# Altium PCB Distro_layout.PcbDoc
Units mm, origin at the board's own origin, x right, y up, seen from the top; angles counter-clockwise.
Board outline 31.75 x 58.42 mm, 2 copper layers (Top Layer, Bottom Layer); 9 components, 13 nets, 54 pads, 3 vias.
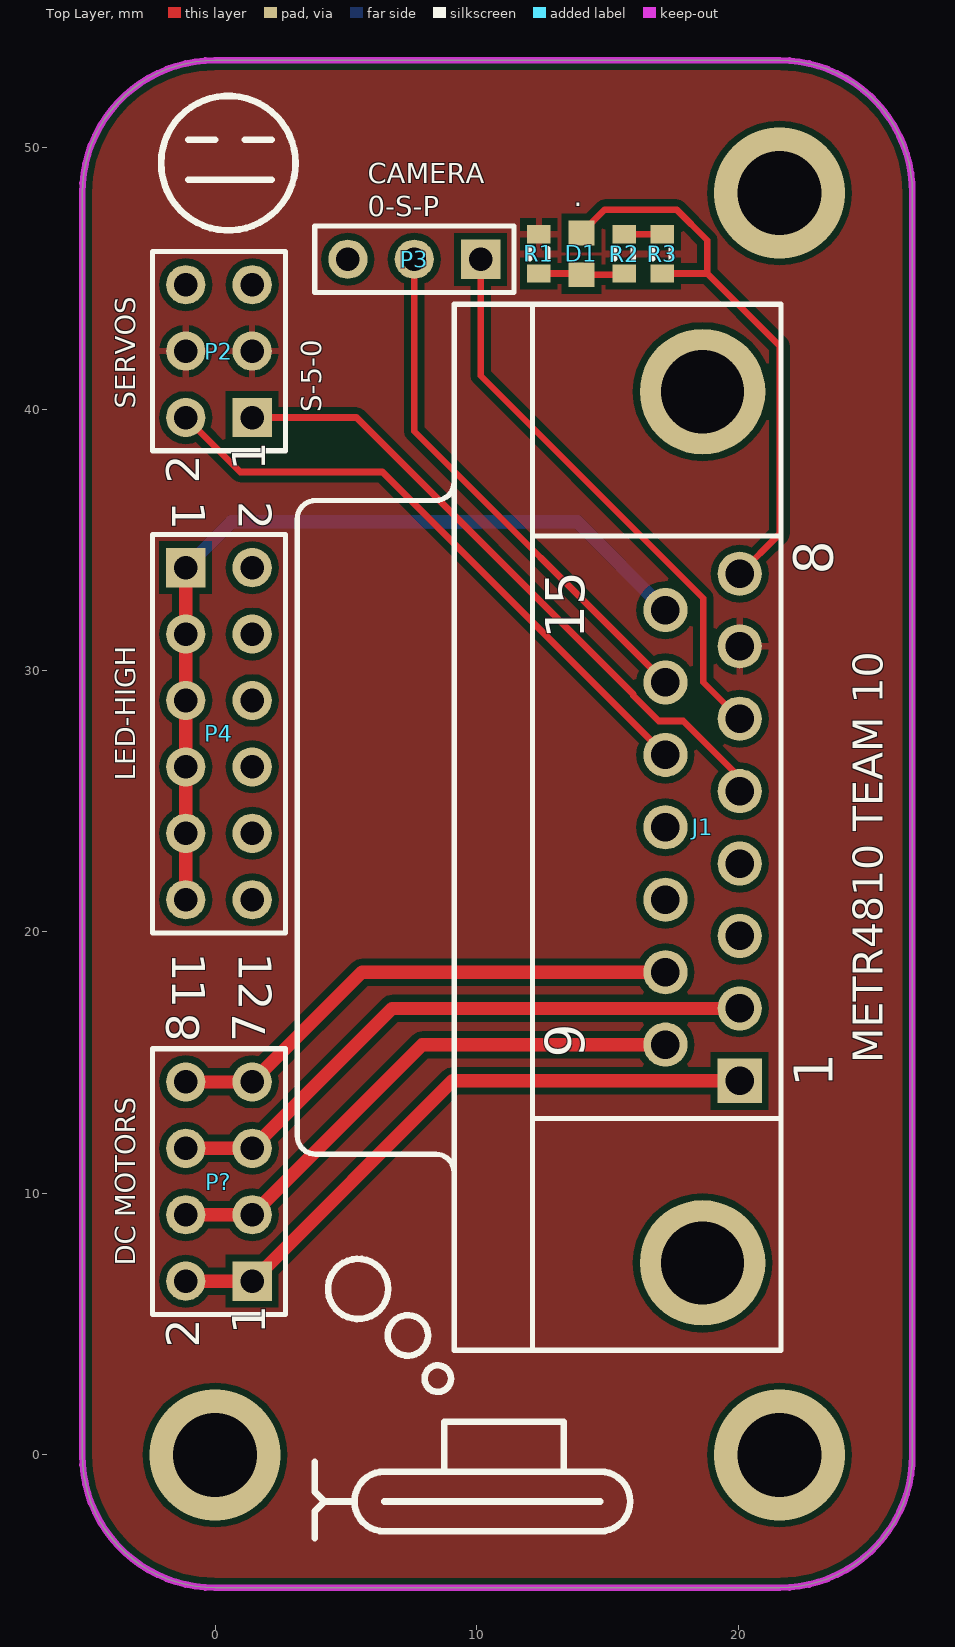
[diagram p0: Top Layer view]
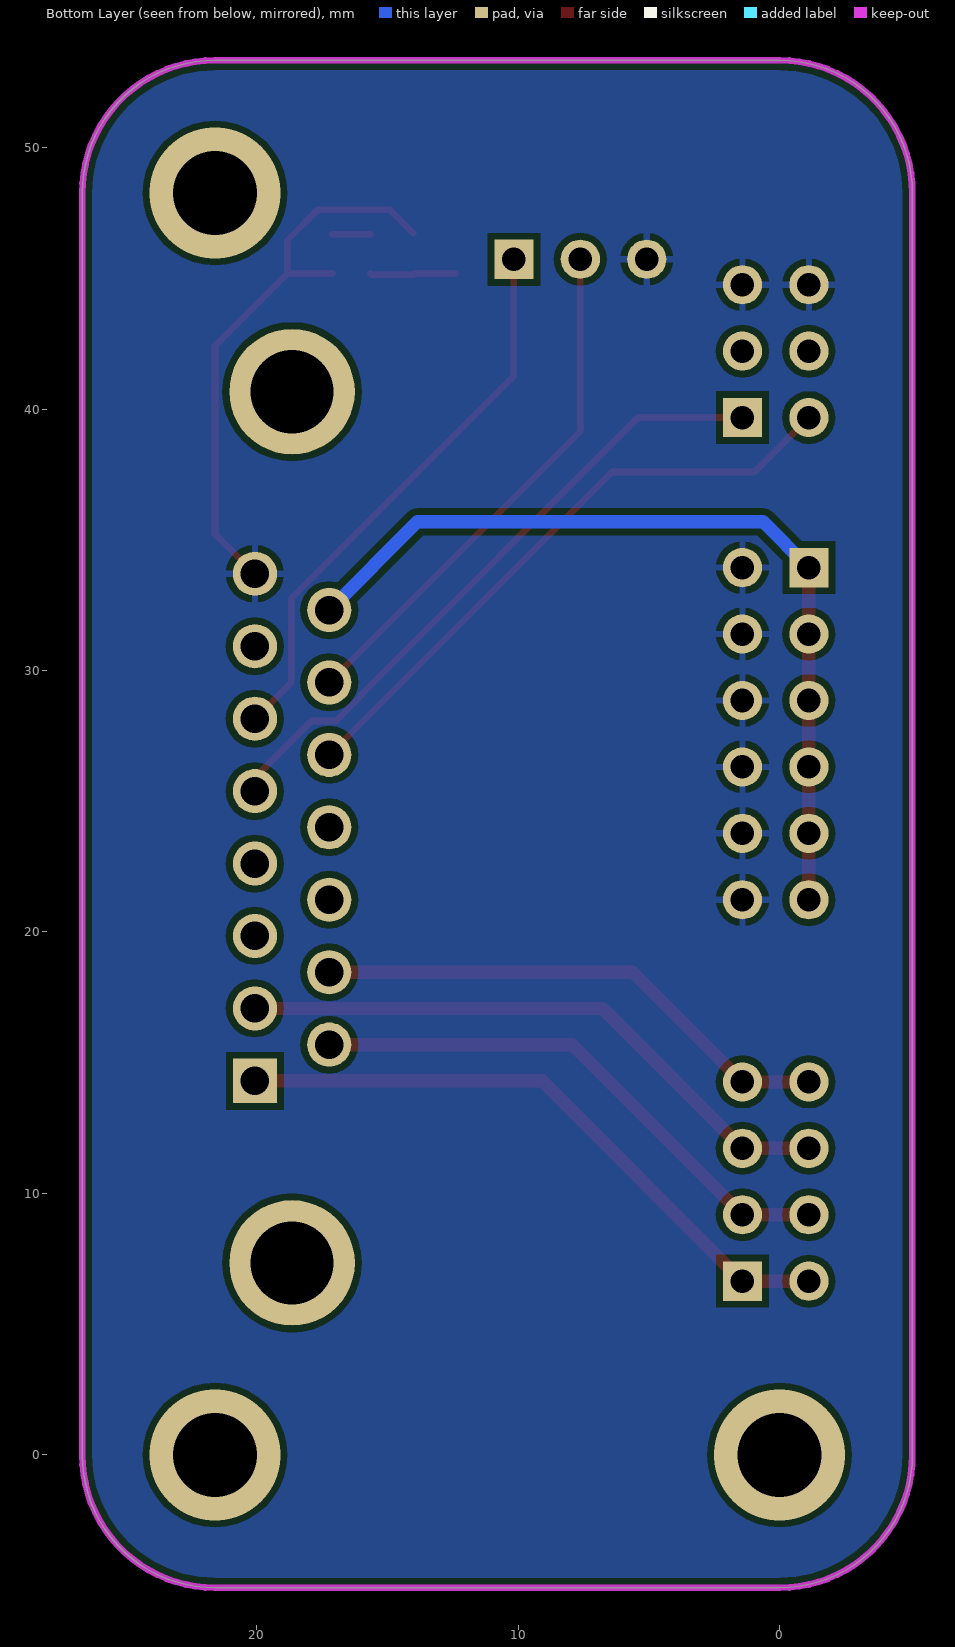
[diagram p1: Bottom Layer view, seen from below]

## Layer stack, top to bottom
Top Solder: solder mask 0.0102, Solder Resist, Dk 3.5
Top Layer: signal copper 0.0356
Dielectric 1: dielectric 0.32, FR-4, Dk 4.8
Bottom Layer: signal copper 0.0356
Bottom Solder: solder mask 0.0102, Solder Resist, Dk 3.5

## Board outline
-5.08,0 -5.08,48.26 cw(c0,48.26) 0,53.34 21.59,53.34 cw(c21.59,48.26) 26.67,48.26 26.67,0 cw(c21.59,0) 21.59,-5.08 0,-5.08 cw(c0,0)

## Design rules (kind name [scope] priority, off if disabled: settings)
Clearance [All] p1: gap=0.254
PolygonConnect [All] p1: connectstyle=Relief reliefconductorwidth=0.254 reliefentries=4 polygonreliefangle="90 Angle" airgapwidth=0.254
RoomDefinition Distro_schematic [InComponentClass('Distro_schematic')] p1: confinementstyle=ConfineIn formatcopy=TRUE lockcomponents=FALSE outline -5.08,-5.08 26.67,-5.08 26.67,53.34 -5.08,53.34
RoutingVias [All] p1: holewidth=0.711 width=1.27 viastyle="Through Hole" minholewidth=0.711 minwidth=1.27 maxholewidth=0.711 maxwidth=1.27
SolderMaskExpansion [All] p1: expansion=0.102
Width [All] p1: maxlimit=1.016 minlimit=0.254 preferedwidth=0.254
30 further rules are at their usual default settings.

## Components (designator, comment, footprint, x,y, rotation, side; value= is the part's Value field where it differs from the comment)
D1 "LED1" L0603 14.014,45.932 r90 top
J1 "D Connector 15" DSUB1.385-2H15 9.144,24.003 r90 top
P2 "Header 3X2" HDR2X3 1.42,39.674 r90 top
P3 "Header 3" HDR1X3 10.16,45.727 r180 top
P4 "Header 6X2" HDR2X6 -1.12,33.934 r270 top
P? "Header 4X2" HDR2X4 1.42,6.646 r90 top
R1 "Res3" J1-0603 12.384,45.932 r270 top
R2 "Res3" J1-0603 15.643,45.932 r90 top
R3 "Res3" J1-0603 17.097,45.932 r270 top

## Footprints (in the part's own frame and the unit in brackets; to place one, negate y for a bottom-side part, rotate by r counter-clockwise, add the part's x,y. Pads: shape width x height; smd on the part's side, far side on the other; paste and mask are expansions set on the pad)
DSUB1.385-2H15 [mm] "Connector; D Subminiature; 15 Position; Right Angle; Pitch 1.385 mm"
  rect 1.69x1.69 hole 1.09: 1(-9.695,-10.92)
  round 1.69 hole 1.09: 2(-6.925,-10.92) 3(-4.155,-10.92) 4(-1.385,-10.92) 5(1.385,-10.92) 6(4.155,-10.92) 7(6.925,-10.92) 8(9.695,-10.92) 9(-8.31,-8.08) 10(-5.54,-8.08) 11(-2.77,-8.08) 12(0,-8.08) 13(2.77,-8.08) 14(5.54,-8.08) 15(8.31,-8.08)
  round 4.8 hole 3.18: 16(-16.66,-9.5) 17(16.66,-9.5)
  silkscreen extent -20,-12.5 20,6
HDR1X3 [mm] "Connector; Header; 3 Position"
  rect 1.5x1.5 hole 0.9: 1(0,0)
  round 1.5 hole 0.9: 2(2.54,0) 3(5.08,0)
  silkscreen extent -1.27,-1.27 6.35,1.27
HDR2X3 [mm] "Connector; Header; 3x2 Position"
  rect 1.5x1.5 hole 0.9: 1(0,0)
  round 1.5 hole 0.9: 2(0,2.54) 3(2.54,0) 4(2.54,2.54) 5(5.08,0) 6(5.08,2.54)
  silkscreen extent -1.27,-1.27 6.35,3.81
HDR2X4 [mm] "Connector; Header; 4x2 Position"
  rect 1.5x1.5 hole 0.9: 1(0,0)
  round 1.5 hole 0.9: 2(0,2.54) 3(2.54,0) 4(2.54,2.54) 5(5.08,0) 6(5.08,2.54) 7(7.62,0) 8(7.62,2.54)
  silkscreen extent -1.27,-1.27 8.89,3.81
HDR2X6 [mm] "Connector; Header; 6x2 Position"
  rect 1.5x1.5 hole 0.9: 1(0,0)
  round 1.5 hole 0.9: 2(0,2.54) 3(2.54,0) 4(2.54,2.54) 5(5.08,0) 6(5.08,2.54) 7(7.62,0) 8(7.62,2.54) 9(10.16,0) 10(10.16,2.54) 11(12.7,0) 12(12.7,2.54)
  silkscreen extent -1.27,-1.27 13.97,3.81
J1-0603 [mm] "Chip Resistor, Body 1.6x0.8mm, IPC High Density"
  rect 0.7x0.9 smd: 1(-0.75,0) 2(0.75,0)
  silkscreen extent -0.2,-0.35 0.2,0.35, body extent -0.85,-0.48 0.85,0.48, height 0.9
L0603 [mm]
  rect 0.95x1 smd: 1(-0.8,0) 2(0.8,0)

## Part data
D1: "Typical RED GaAs LED"
J1: "Receptacle Assembly, 15 Position, Right Angle"
P2: "Header, 3-Pin, Dual row"
P3: "Header, 3-Pin"
P4: "Header, 6-Pin, Dual row"
P?: "Header, 4-Pin, Dual row"
R1 R2 R3: "Resistor"

## Via types
v1: diameter 5, hole 3.2, Top Layer to Bottom Layer, 3 vias

## Nets (pads, with @x,y where several pads share a name; then routed paths per layer and width w, separated by ;. In a path a pad name is that pad's centre, name@x,y a point inside that pad or via, vN(x,y) a via of type N, cw(c..) or ccw(c..) an arc to the next point about the centre after c; other vN are vias at no path point)
BAT: J1.15 P4.1 P4.3 P4.5 P4.7 P4.9 P4.11 | length 33.2
  Top Layer w0.508: P4.11 P4.9 P4.7 P4.5 P4.3 P4.1
  Bottom Layer w0.508: P4.1 0.633,35.687 13.85,35.687 J1.15
CAM_POW: J1.6 P3.1 | length 21.7
  Top Layer w0.254: P3.1 10.16,41.275 18.669,32.766 18.669,29.553 J1.6
CAM_SIG: J1.14 P3.2 | length 20.2
  Top Layer w0.254: P3.2 7.62,39.147 J1.14
GND: D1.2 J1.8 P2.5 P2.6 P3.3 P4.2 P4.4 P4.6 P4.8 P4.10 P4.12 R3.2 | length 21.9
  Top Layer w0.254: D1.2 14.906,47.625 17.653,47.625 18.826,46.452 18.826,45.182 ; R3.2 18.826,45.182 ; J1.8 21.59,35.224 21.59,42.418 18.826,45.182
MOTOR_1A: J1.1 P?.1 P?.2 | length 24.4
  Top Layer w0.508: P?.2 P?.1 9.082,14.308 J1.1
MOTOR_1B: J1.9 P?.3 P?.4 | length 21
  Top Layer w0.508: P?.4 P?.3 7.927,15.693 J1.9
MOTOR_2A: J1.2 P?.5 P?.6 | length 23.4
  Top Layer w0.508: P?.6 P?.5 6.772,17.078 J1.2
MOTOR_2B: J1.10 P?.7 P?.8 | length 20.1
  Top Layer w0.508: P?.8 P?.7 5.617,18.463 J1.10
NetR2_2: R2.2 R3.1 | length 1.5
  Top Layer w0.254: R2.2 R3.1
POWER: D1.1 R1.2 R2.1 | length 3.3
  Top Layer w0.254: R1.2 13.964,45.182 D1.1 15.593,45.132 R2.1
"PWM SV 1": J1.5 P2.1 | length 24.9
  Top Layer w0.254: P2.1 5.411,39.674 15.998,29.087 15.998,29.035 16.966,28.067 17.907,28.067 20.064,25.91 J1.5
"PWM SV 2": J1.13 P2.2 | length 23.7
  Top Layer w0.254: P2.2 0.962,37.592 6.405,37.592 J1.13
VCC: J1.7 P2.3 P2.4 R1.1
pads on no net: J1.3 J1.4 J1.11 J1.12 J1.16 J1.17
copper on no net:
  other v1: 0,0 21.59,0 21.59,48.26

## Polygon pours and split planes (outlines as drawn)
GND on Bottom Layer "GND_L02_P000" (solid, remove dead copper, pour order 0): -5.08,0 -5.08,48.26 cw(c0,48.26) 0,53.34 21.59,53.34 cw(c21.59,48.26) 26.67,48.26 26.67,0 cw(c21.59,0) 21.59,-5.08 0,-5.08 cw(c0,0)
VCC on Top Layer "VCC_L01_P001" (solid, remove dead copper, pour order 1): -5.08,0 -5.08,48.26 cw(c0,48.26) 0,53.34 21.59,53.34 cw(c21.59,48.26) 26.67,48.26 26.67,0 cw(c21.59,0) 21.59,-5.08 0,-5.08 cw(c0,0)

## Keep-outs
Keep-Out Layer:
  the board outline again, w0.254

## Silkscreen, mask and mechanical layers (free items; w line width, h text height)
Top Overlay:
  circle w0.254: c5.472,6.35 r1.15
  circle w0.254: c7.377,4.572 r0.773
  circle w0.254: c8.52,2.921 r0.508
  circle w0.254: c0.508,49.403 r2.572
  lines w0.254: -1.016,48.768 2.159,48.768 ; -1.016,50.292 0,50.292 ; 1.143,50.292 2.159,50.292 ; 3.81,-3.175 3.81,-2.159 4.191,-1.778 ; 3.81,-0.254 3.81,-1.397 4.191,-1.778 ; 5.334,-1.778 4.191,-1.778 ; 6.477,-1.778 14.732,-1.778 ; 8.763,-0.635 8.763,1.27 13.335,1.27 13.335,-0.635 ; 6.477,-2.921 cw(c6.477,-1.778) 6.477,-0.635 14.732,-0.635 cw(c14.732,-1.778) 14.732,-2.921 6.477,-2.921
  text "CAMERA" at 5.842,48.641 h0.76
  text "." at 13.716,47.752 h0.76
  text "0-S-P" at 5.842,47.371 h0.76
  text "SERVOS" at -3.048,40.005 h0.76 r90
  text "S-5-0" at 4.064,39.878 h0.76 r90
  text "LED-HIGH" at -3.048,25.781 h0.76 r90
  text "METR4810 TEAM 10" at 25.527,14.986 h1.14 r90
  text "DC MOTORS" at -3.048,7.239 h0.76 r90

## Text inside footprints (layer, text, board x,y; h text height)
J1: Top Overlay "1" at 23.619,14.058 h1.5 r90; Top Overlay "8" at 23.619,33.655 h1.5 r90; Top Overlay "15" at 14.119,31.188 h1.5 r90; Top Overlay "9" at 14.119,15.193 h1.5 r90
P2: Top Overlay "1" at 1.928,37.642 h1.27 r90; Top Overlay "2" at -0.612,37.134 h1.27 r90
P4: Top Overlay "2" at 0.912,36.474 h1.27 r270; Top Overlay "1" at -1.628,36.474 h1.27 r270; Top Overlay "1" at -1.628,19.202 h1.27 r270; Top Overlay "1" at -1.628,18.186 h1.27 r270; Top Overlay "12" at 0.912,19.202 h1.27 r270
P?: Top Overlay "8" at -0.612,15.79 h1.27 r90; Top Overlay "7" at 1.928,15.79 h1.27 r90; Top Overlay "1" at 1.928,4.614 h1.27 r90; Top Overlay "2" at -0.612,4.106 h1.27 r90